# EAGLE board midi2cv.2.2.pnl (EAGLE 7.5.0)
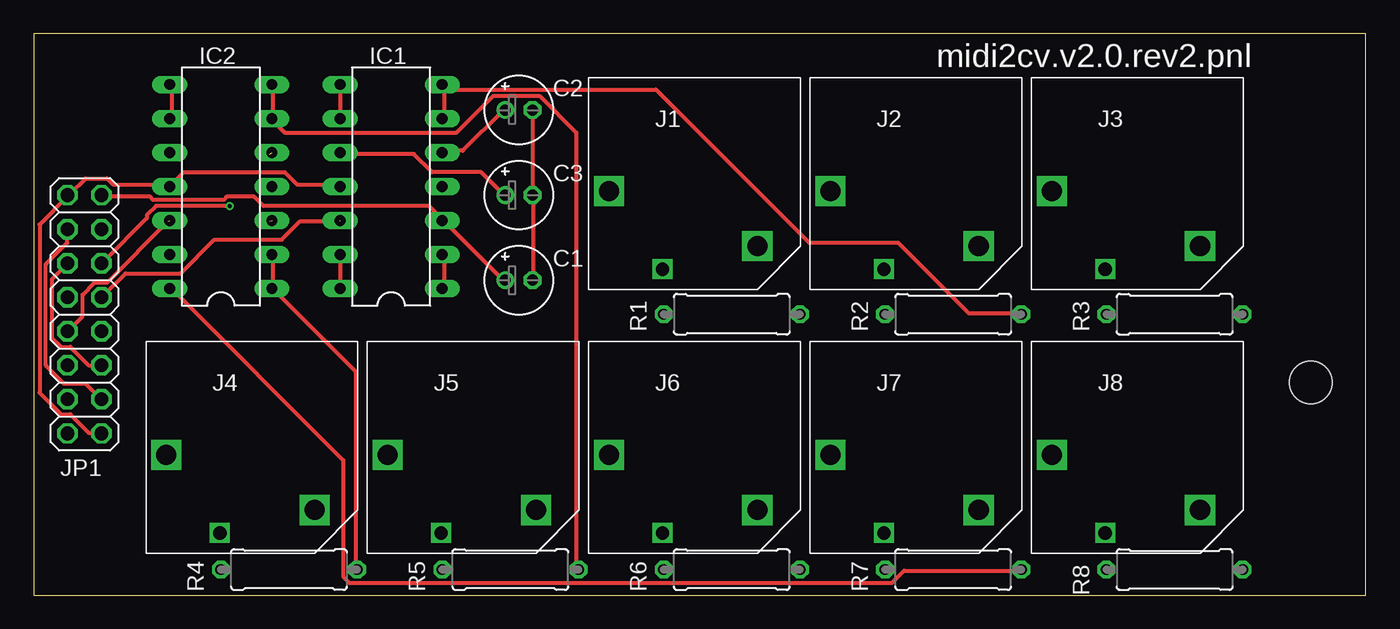
[diagram p0: board, top side]
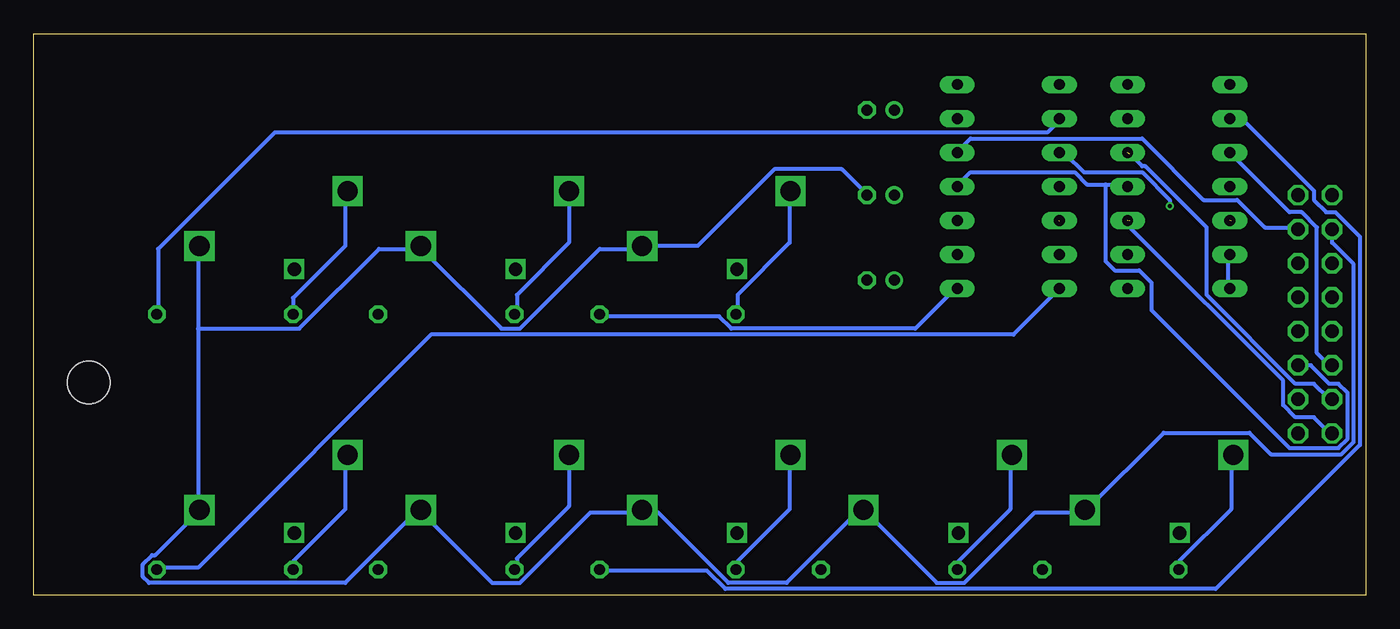
[diagram p1: board, bottom side, seen from below]

Size 99.36 x 41.9 mm. Coordinates in mm from the lower left corner, seen from the top.
Outline: 0,0 99.36,0 99.36,41.9 0,41.9 0,0
Copper layers (1*16): Top 0.035mm / dielectric 1.5mm / Bottom 0.035mm
Design rules "default *": minimum track width 12mil, minimum drill 12mil, track to track 6mil, track to pad 6mil, pad to pad 6mil, via to via 6mil, smd to smd 0mil, copper to edge 10mil, drill to drill 10mil, minimum pad ring 10mil, minimum via ring 6mil, stop-mask expansion 2mil, vias tented up to drill 100mil, thermal gap 10mil
Holes 3.2 mm at 95.25,15.88

## Footprints (pad centres in the part's own frame; a part is rotated, then mirrored left to right if it is on the bottom)
E2-5 = drill 0.813 pad 1.27: + -1.016,0 | drill 0.813 pad 1.27 octagon: - 1.016,0
DIL14 = drill 0.813 long: 1 -7.62,-3.81; 2 -5.08,-3.81; 3 -2.54,-3.81; 4 0,-3.81; 5 2.54,-3.81; 6 5.08,-3.81; 7 7.62,-3.81; 8 7.62,3.81; 9 5.08,3.81; 10 2.54,3.81; 11 0,3.81; 12 -2.54,3.81; 13 -5.08,3.81; 14 -7.62,3.81
ACJM-MV35-2S = drill 1.5 square: P$1 0,0; P$3 -11.05,4.11 | drill 1 square: P$2 -7.07,-1.71
2X08 = drill 1.016 octagon: 1 -8.89,-1.27; 2 -8.89,1.27; 3 -6.35,-1.27; 4 -6.35,1.27; 5 -3.81,-1.27; 6 -3.81,1.27; 7 -1.27,-1.27; 8 -1.27,1.27; 9 1.27,-1.27; 10 1.27,1.27; 11 3.81,-1.27; 12 3.81,1.27; 13 6.35,-1.27; 14 6.35,1.27; 15 8.89,-1.27; 16 8.89,1.27
0309/10 = drill 0.813 octagon: 1 -5.08,0; 2 5.08,0

## Placement (x,y rotation side)
C1  4.7uF  [E2-5]  36.2,23.5 0 top
C2  4.7uF  [E2-5]  36.2,36.2 0 top
C3  4.7uF  [E2-5]  36.2,29.84 0 top
IC1  TL084P  [DIL14]  26.67,30.48 90 top
IC2  TL084P  [DIL14]  13.97,30.48 90 top
J1  CV3 OUT  [ACJM-MV35-2S]  53.98,26.04 0 top
J2  CV2 OUT  [ACJM-MV35-2S]  70.48,26.04 0 top
J3  CV1 OUT  [ACJM-MV35-2S]  87,26.04 0 top
J4  GATE5 OUT  [ACJM-MV35-2S]  20.95,6.35 0 top
J5  GATE4 OUT  [ACJM-MV35-2S]  37.47,6.35 0 top
J6  GATE3 OUT  [ACJM-MV35-2S]  53.98,6.35 0 top
J7  GATE2 OUT  [ACJM-MV35-2S]  70.48,6.35 0 top
J8  GATE1 OUT  [ACJM-MV35-2S]  87,6.35 0 top
JP1  TO MAIN  [2X08]  3.81,20.95 90 top
R1  1K  [0309/10]  52.07,20.95 180 top
R2  1K  [0309/10]  68.58,20.95 180 top
R3  1K  [0309/10]  85.09,20.95 180 top
R4  1K  [0309/10]  19.05,1.91 0 top
R5  1K  [0309/10]  35.56,1.91 0 top
R6  1K  [0309/10]  52.07,1.91 0 top
R7  1K  [0309/10]  68.58,1.91 0 top
R8  1K  [0309/10]  85.09,1.91 180 top

## Library data of the parts
C1-C3 IC1 IC2 R1-R8 = _common
J1-J8 = jacks
JP1 = pinhead

## Nets
0V: C1.- C2.- C3.- J1.P$1 J2.P$1 J3.P$1 J4.P$1 J5.P$1 J6.P$1 J7.P$1 J8.P$1 JP1.3 JP1.14
+12V: IC1.4 IC2.4 JP1.5 JP1.12
-12V: IC1.11 IC2.11 JP1.1 JP1.16
CV1: C3.+ IC1.10 JP1.11
CV2: C2.+ IC1.5 JP1.13
CV3: C1.+ IC1.3 JP1.15
GATE1: IC1.12 JP1.9
GATE2: IC2.12 JP1.8
GATE3: IC2.10 JP1.6
GATE4: IC2.5 JP1.4
GATE5: IC2.3 JP1.2
N$2: IC1.1 IC1.2 R1.1
N$3: IC1.6 IC1.7 R2.1
N$4: IC1.8 IC1.9 R3.1
N$7: IC1.13 IC1.14 R8.1
N$21: J4.P$3 R4.1
N$22: J5.P$3 R5.1
N$23: J6.P$3 R6.1
N$24: J7.P$3 R7.1
N$25: J8.P$3 R8.2
N$31: IC2.13 IC2.14 R7.2
N$35: IC2.8 IC2.9 R6.2
N$36: IC2.6 IC2.7 R5.2
N$37: IC2.1 IC2.2 R4.2
N$44: J1.P$3 R1.2
N$45: J2.P$3 R2.2
N$46: J3.P$3 R3.2

## Tracks (layer width: path | path; a pad name or v marks a point on that pad's centre or on a via)
0V
  Top 0.305: C1.- 37.26,23.55 37.26,29.72 C3.- 37.26,29.95 37.26,36.12 C2.- | JP1.14 2.52,27.2 2.52,26.29 0.91,24.69 0.91,17.14 2.29,15.77 3.89,15.77 5.03,14.63 JP1.3
  Bottom 0.305: C3.- 37.26,29.95 39.09,31.77 44.12,31.77 49.84,26.06 53.95,26.06 J1.P$1 54.18,25.83 57.15,25.83 63.09,19.89 64.47,19.89 70.41,25.83 J2.P$1 70.64,25.83 73.61,25.83 79.55,19.89 87.1,19.89 | 87.1,19.89 87.1,25.83 J3.P$1 | 87.1,19.89 87.1,6.4 J8.P$1 87.1,6.17 90.3,2.97 90.53,2.97 91.21,2.29 91.21,1.37 90.75,0.91 76.12,0.91 70.64,6.4 J7.P$1 70.41,6.17 65.15,0.91 63.09,0.91 57.84,6.17 54.18,6.17 J6.P$1 53.95,6.17 52.81,6.17 47.55,0.91 43.2,0.91 37.95,6.17 37.49,6.17 J5.P$1 37.26,6.17 32,0.91 29.95,0.91 24.69,6.17 21.03,6.17 J4.P$1 20.8,6.4 15.09,12.12 8.69,12.12 7.09,10.52 1.83,10.52 0.91,11.43 0.91,24.69 2.52,26.29 2.52,27.2 JP1.14
+12V
  Top 0.305: JP1.5 4.12,17.14 2.74,18.52 2.06,18.52 1.37,19.2 1.37,23.55 2.52,24.69 JP1.12
  Bottom 0.305: 19.43,30.63 20.8,30.63 21.72,31.55 29.49,31.55 30.4,30.63 IC1.4 | 19.43,30.63 17.83,30.63 IC2.4 | JP1.5 4.12,17.14 2.74,15.77 2.06,15.77 1.37,15.09 1.37,11.66 2.06,10.97 5.71,10.97 16,21.26 16,23.32 16.92,24.23 18.75,24.23 19.43,24.92 19.43,30.63
-12V
  Top 0.305: IC1.11 22.86,30.63 19.66,30.63 18.75,31.55 11.2,31.55 10.29,30.63 IC2.11 10.06,30.63 5.94,30.63 5.49,31.09 3.89,31.09 2.74,29.95 JP1.16 2.52,29.72 0.46,27.66 0.46,15.09 2.06,13.49 2.74,13.49 4.12,12.12 5.03,12.12 JP1.1
CV1  (via drill 0.3)
  Top 0.305: IC1.10 22.86,32.92 28.35,32.92 29.72,31.55 33.38,31.55 34.98,29.95 C3.+ | v14.63,29.03 9.14,29.03 8.46,28.35 8.46,28.12 5.26,24.92 JP1.11
  Bottom 0.305: v14.63,29.03 14.63,29.49 16.69,31.55 21.03,31.55 22.4,32.92 22.86,32.92 IC1.10
CV2
  Top 0.305: IC1.5 30.63,33.15 32,33.15 34.98,36.12 C2.+
  Bottom 0.305: JP1.13 5.26,27.43 7.54,27.43 9.6,29.49 12.12,29.49 16.69,34.06 29.49,34.06 30.4,33.15 IC1.5
CV3
  Top 0.305: C1.+ 34.98,23.55 30.63,27.89 IC1.3 30.4,28.12 29.49,29.03 17.14,29.03 16.46,29.72 14.4,29.72 14.17,29.49 8.91,29.49 8.69,29.72 5.26,29.72 JP1.15
GATE1  (1 unrouted)
  Top 0.305: 22.86,27.89 19.89,27.89 18.52,26.52 13.49,26.52 10.97,24 6.86,24 JP1.9
GATE2  (1 unrouted)
  Top 0.305: 10.06,27.89 5.49,23.32 4.57,23.32 3.66,22.4 3.66,20.8 JP1.8
GATE3
  Bottom 0.305: IC2.10 5.71,28.57 4.8,28.57 3.66,27.43 3.66,18.06 2.74,17.14 JP1.6
GATE4  (1 unrouted)
  Bottom 0.305: 17.6,32.92 16.69,32 16.46,32 11.89,27.43 11.89,22.4 5.26,15.77 3.89,15.77 2.74,14.63 JP1.4
GATE5  (1 unrouted)
  Bottom 0.305: 17.6,27.89 17.6,27.43 6.17,16 6.17,14.17 5.26,13.26 3.89,13.26 2.74,12.12 JP1.2
N$2
  Top 0.305: IC1.1 30.63,22.86 30.63,25.38 IC1.2
  Bottom 0.305: R1.1 57.15,20.8 48.23,20.8 47.32,19.89 33.6,19.89 30.63,22.86 IC1.1
N$3
  Top 0.305: 30.63,37.72 30.63,37.95 IC1.7 30.63,37.72 | 30.63,37.72 30.63,35.66 IC1.6 | 30.63,37.72 46.41,37.72 57.84,26.29 64.47,26.29 69.72,21.03 73.61,21.03 R2.1
N$4
  Top 0.305: IC1.8 IC1.9
  Bottom 0.305: R3.1 90.07,21.03 90.07,25.83 81.38,34.52 23.77,34.52 22.86,35.43 IC1.9
N$7
  Top 0.305: IC1.13 IC1.14
  Bottom 0.305: IC1.14 26.29,19.43 69.72,19.43 87.1,2.06 90.07,2.06 R8.1
N$21
  Bottom 0.305: R4.1 13.95,2.06 13.95,2.52 10.06,6.4 10.06,10.29 J4.P$3
N$22
  Bottom 0.305: R5.1 30.4,2.06 30.4,2.52 26.52,6.4 26.52,10.29 J5.P$3
N$23
  Bottom 0.305: R6.1 46.86,2.06 46.86,2.52 42.98,6.4 42.98,10.29 J6.P$3
N$24
  Bottom 0.305: R7.1 63.32,2.06 63.32,2.74 59.44,6.63 59.44,10.29 J7.P$3
N$25
  Bottom 0.305: R8.2 80.01,2.52 76.12,6.4 76.12,10.29 J8.P$3
N$31
  Top 0.305: R7.2 73.61,1.83 64.92,1.83 64.01,0.91 23.55,0.91 23.09,1.37 23.09,10.06 10.29,22.86 IC2.14
  Bottom 0.305: IC2.14 10.29,22.86 10.29,25.38 IC2.13
N$35
  Top 0.305: IC2.9 10.29,35.66 10.29,37.95 IC2.8
  Bottom 0.305: R6.2 57.15,1.83 49.15,1.83 47.78,0.46 11.2,0.46 0.46,11.2 0.46,26.75 2.29,28.57 2.97,28.57 3.89,29.49 3.89,30.18 9.14,35.43 10.06,35.43 IC2.9
N$36
  Top 0.305: IC2.7 17.83,37.95 17.83,35.66 IC2.6 17.83,35.43 18.75,34.52 31.55,34.52 34.29,37.26 37.72,37.26 40.46,34.52 40.46,2.06 R5.2
N$37
  Top 0.305: 17.83,22.86 17.83,25.38 IC2.2 | 17.83,22.86 24,16.69 24,2.06 R4.2 | 17.83,22.86 IC2.1
N$44
  Bottom 0.305: R1.2 46.86,21.03 46.86,22.4 42.98,26.29 42.98,29.95 J1.P$3
N$45
  Bottom 0.305: R2.2 63.32,21.03 63.32,22.4 59.44,26.29 59.44,29.95 J2.P$3
N$46
  Bottom 0.305: R3.2 80.01,22.17 76.12,26.06 76.12,29.95 J3.P$3

## Text on the board
tNames: midi2cv.v2.0.rev2.pnl